# Altium PCB spider - Copy.PcbDoc
Units mm, origin at the board's own origin, x right, y up, seen from the top; angles counter-clockwise.
Board outline 30.2 x 24 mm, 4 copper layers (Top Layer, GND, 3V3, Bottom Layer), stack 0.603 mm thick; 52 components, 40 nets, 195 pads, 13 vias.
Unrouted connection lines stored in the file: 80.
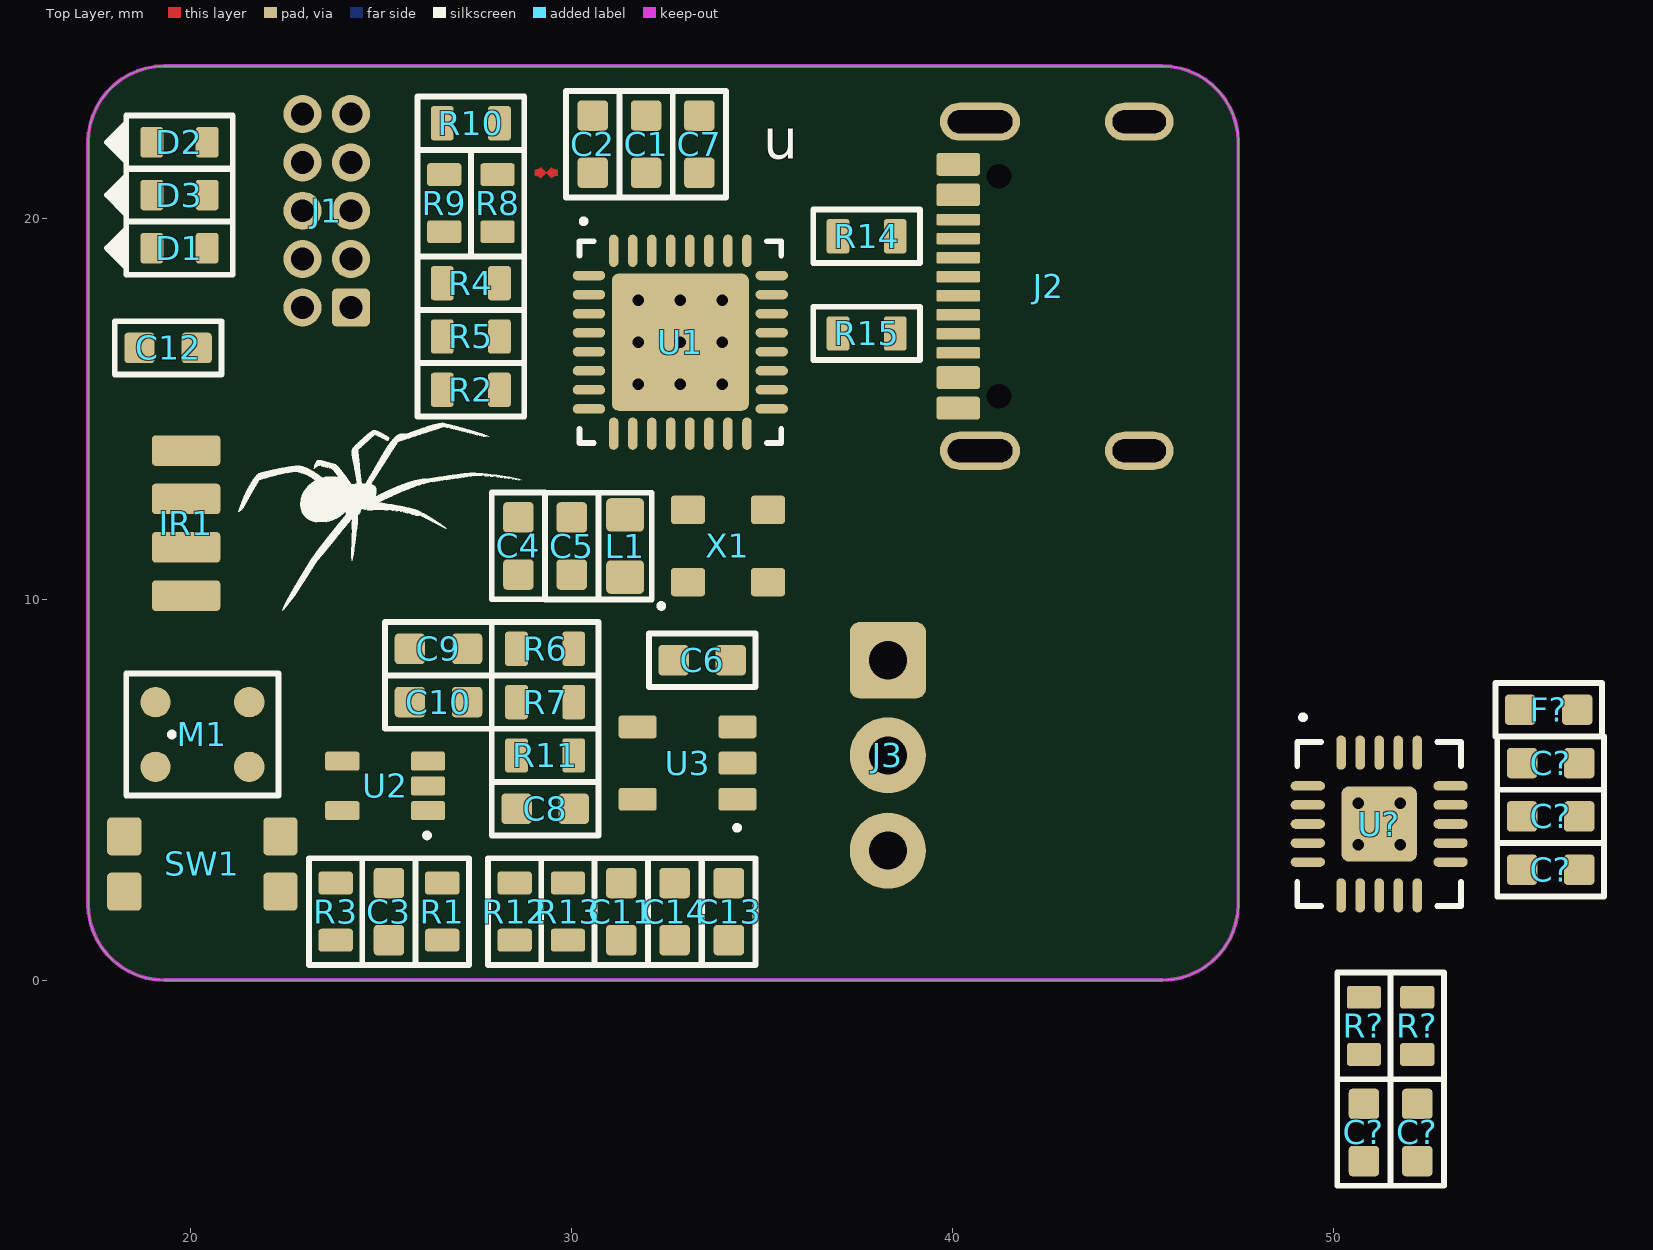
[diagram p0: Top Layer view]
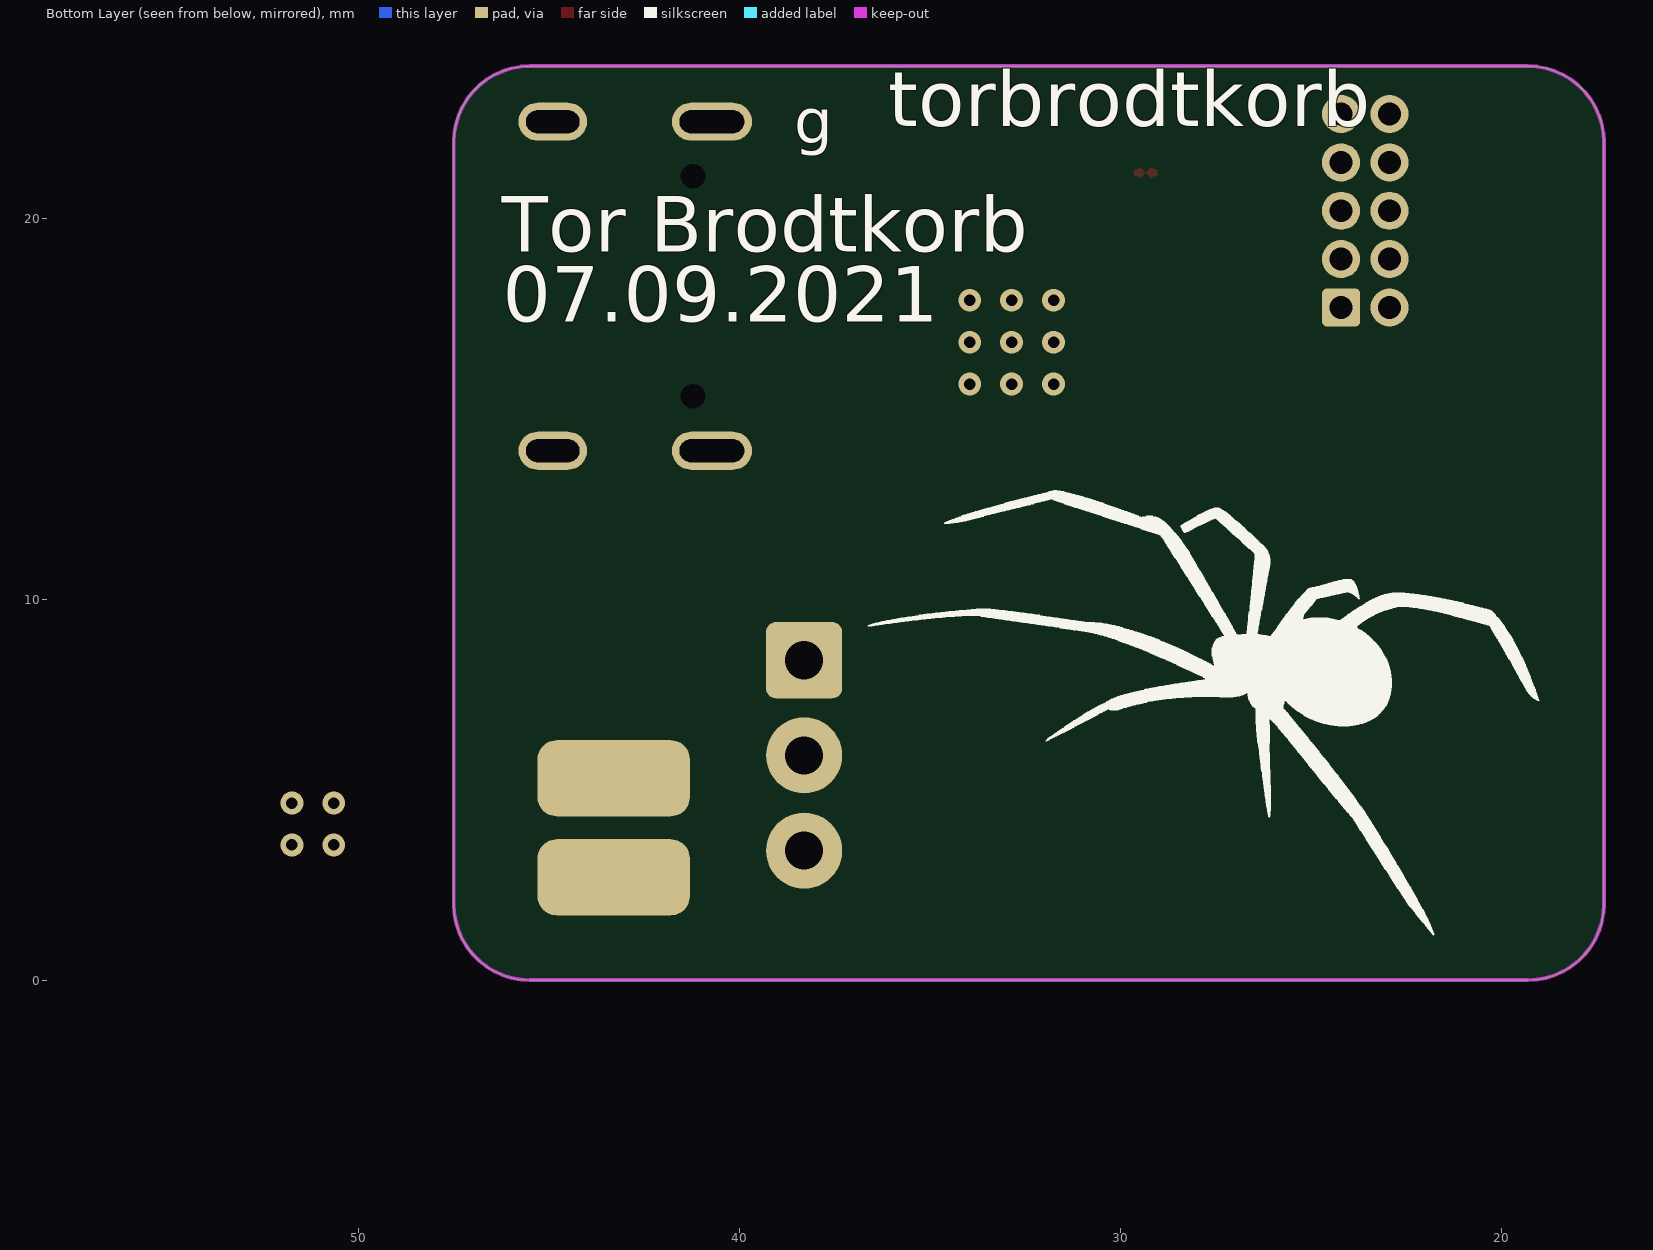
[diagram p1: Bottom Layer view, seen from below]
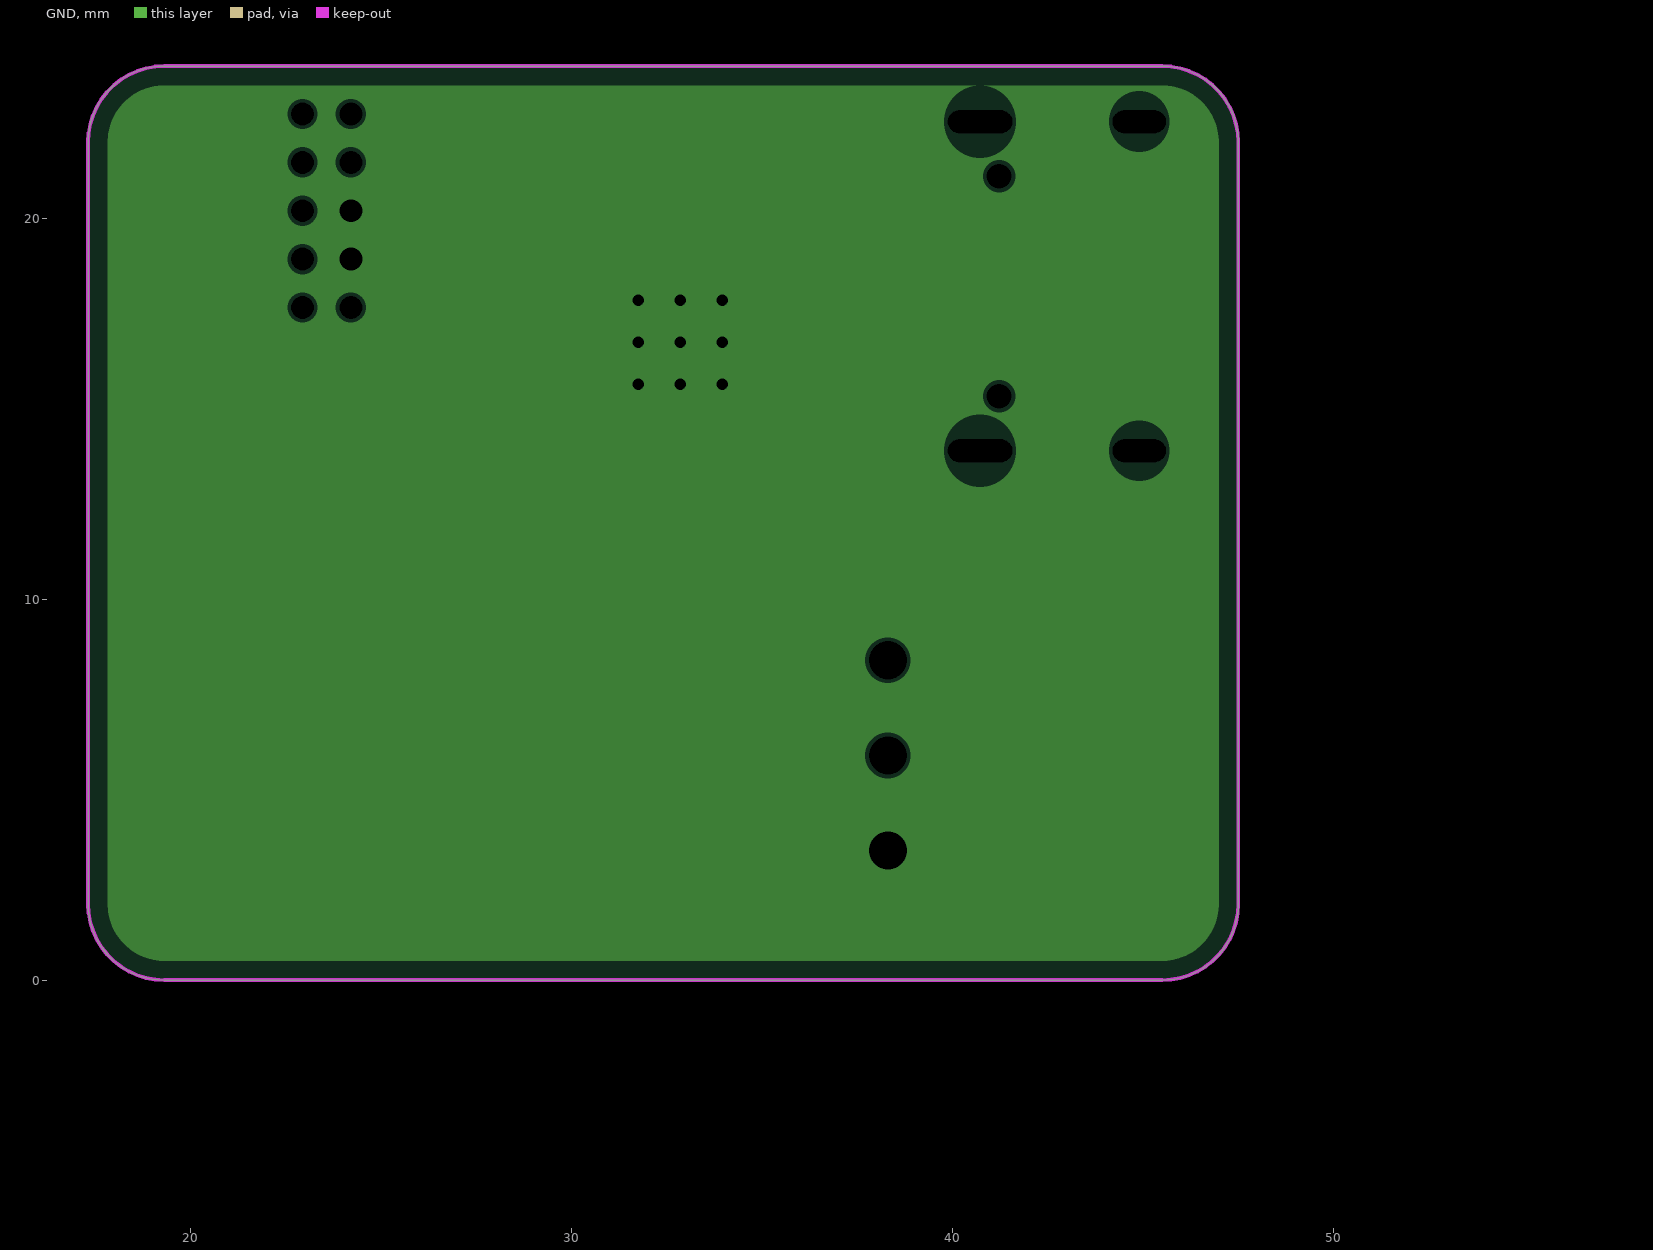
[diagram p2: GND, clearances drawn from the general rule]
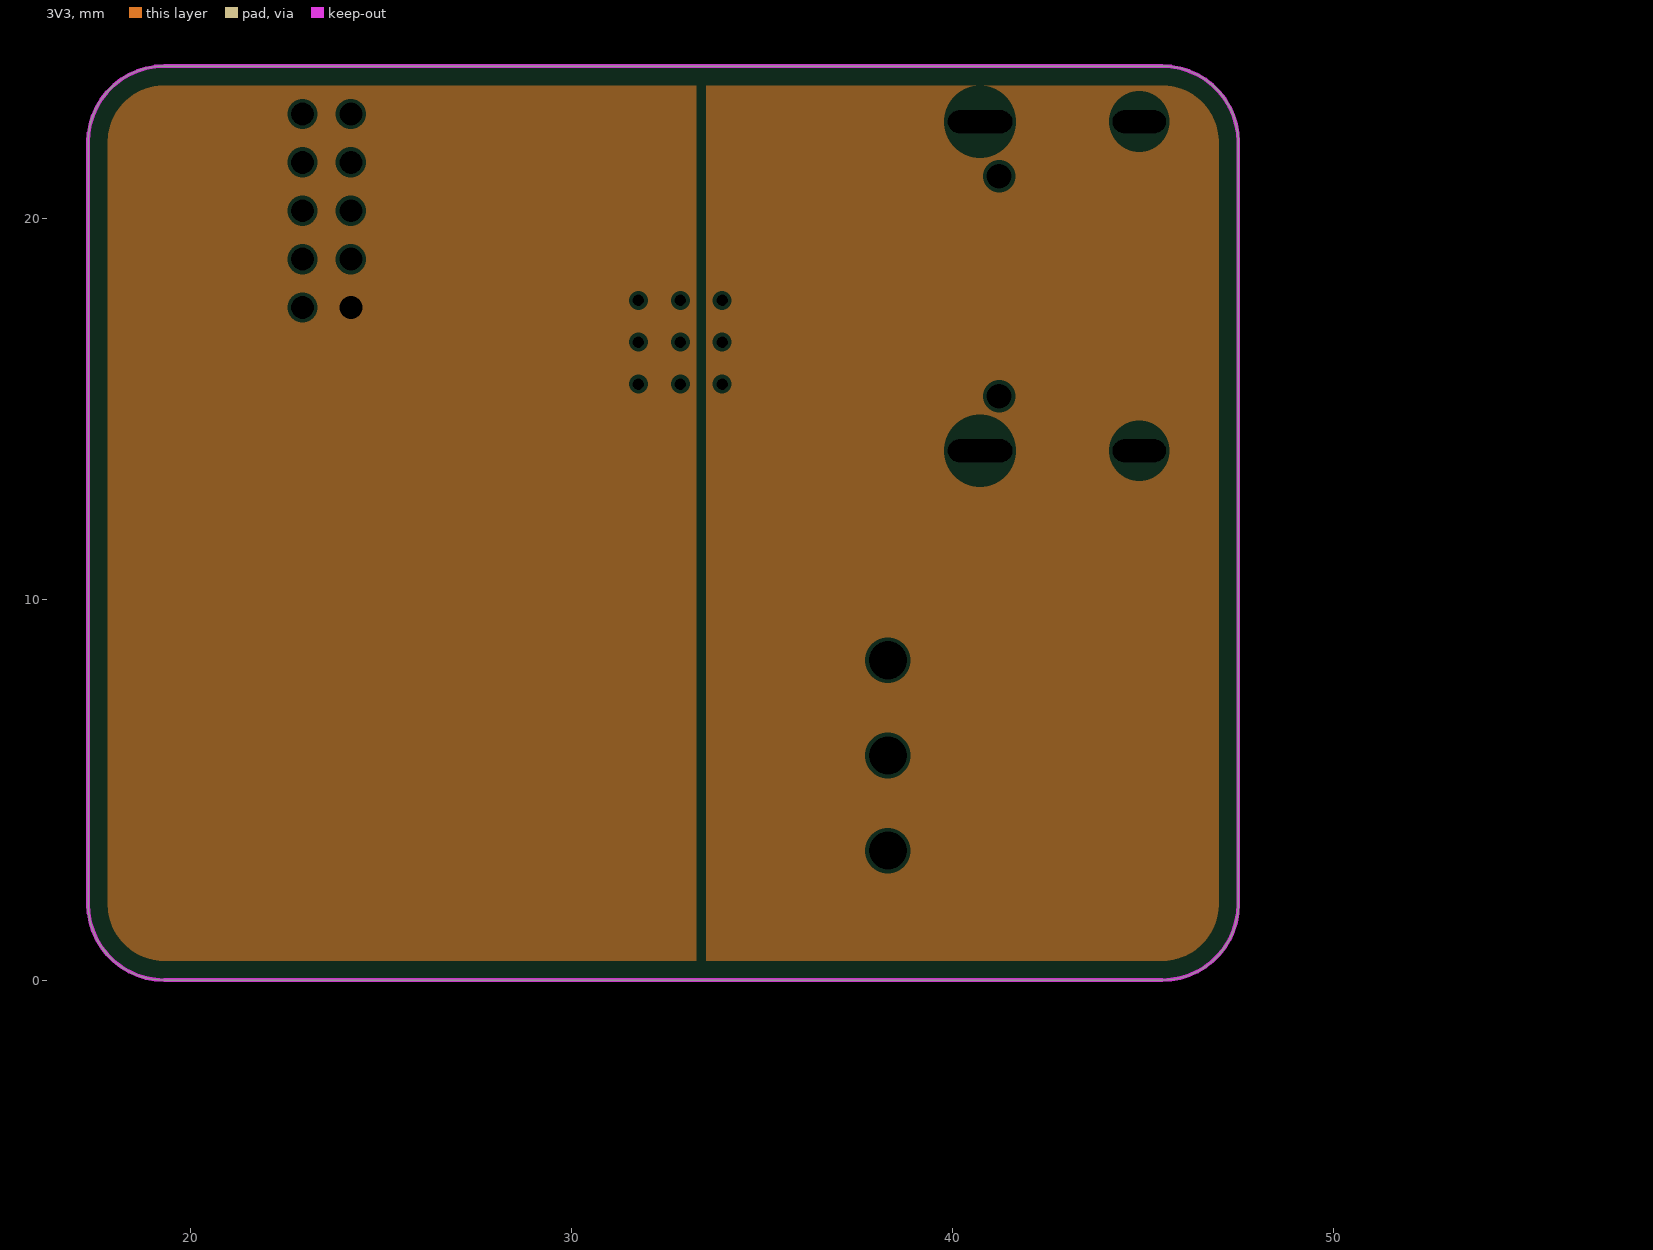
[diagram p3: 3V3, clearances drawn from the general rule]

## Layer stack, top to bottom
Top Solder: solder mask 0.0102, Solder Resist, Dk 3.5
Top Layer: signal copper 0.0356
Dielectric 2: prepreg 0.0711, PP-006, Dk 4.1
GND: plane copper 0.035, net GND
Dielectric 1: dielectric 0.32, FR-4, Dk 4.8
3V3: plane copper 0.035, net 3V3
Dielectric 3: prepreg 0.0711, PP-006, Dk 4.1
Bottom Layer: signal copper 0.0356
Bottom Solder: solder mask 0.0102, Solder Resist, Dk 3.5

## Board outline
17.3,2 ccw(c19.3,2) 19.3,0 45.5,0 ccw(c45.5,2) 47.5,2 47.5,22 ccw(c45.5,22) 45.5,24 19.3,24 ccw(c19.3,22) 17.3,22

## Design rules (kind name [scope] priority, off if disabled: settings)
BoardOutlineClearance [All] p1: gap=0.198 ignorepadtopadclearanceinfootprint=FALSE except(0: Arc-SplitContinuation Track-SplitContinuation SMDPad-SplitContinuation THPad-SplitContinuation Via-SplitContinuation Fill-SplitContinuation Poly-SplitContinuation Region-SplitContinuation Text-SplitContinuation)
Clearance [All] p1: gap=0.152 ignorepadtopadclearanceinfootprint=TRUE except(0.305: Arc-Hole Track-Hole SMDPad-Hole THPad-Hole Via-Hole Fill-Hole Poly-Hole Region-Hole Text-Hole)
ComponentClearance [All] p1: gap=0.1 collisioncheckmode=3 verticalgap=0.1 showdistances=FALSE
DiffPairsRouting DiffPairsRouting_USB [InDifferentialPair('USB')] p1: maxlimit=0.5 minlimit=0.16 mostfreqgap=0.2 toplayer_minwidth=0.16 toplayer_maxwidth=5 toplayer_prefwidth=0.265 bottomlayer_minwidth=0.16 bottomlayer_maxwidth=5 bottomlayer_prefwidth=0.265 maxuncoupledlength=12.7
DiffPairsRouting DiffPairsRouting_ETH [InDifferentialPair('ETH_RX') or InDifferentialPair('ETH_TX')] p2: maxlimit=0.5 minlimit=0.16 mostfreqgap=0.194 toplayer_minwidth=0.16 toplayer_maxwidth=5 toplayer_prefwidth=0.22 bottomlayer_minwidth=0.16 bottomlayer_maxwidth=5 bottomlayer_prefwidth=0.22 maxuncoupledlength=12.7
DiffPairsRouting [All] p3: maxlimit=0.5 minlimit=0.16 mostfreqgap=0.3 toplayer_minwidth=0.16 toplayer_maxwidth=5 toplayer_prefwidth=0.3 bottomlayer_minwidth=0.16 bottomlayer_maxwidth=5 bottomlayer_prefwidth=0.3 maxuncoupledlength=12.7
HoleSize [All] p1: absolutevalues=TRUE maxlimit=6.3 minlimit=0.025 maxpercent=80.000 minpercent=20.000
MatchedLengths MatchedLengths_1 [InNetClass('RX')] p1: tolerance=2 checknetsindiffpair=FALSE checkdiffpairvsdiffpair=TRUE checkxsignals=TRUE checkothers=TRUE
MatchedLengths [InNetClass('TX')] p2: tolerance=2 checknetsindiffpair=FALSE checkdiffpairvsdiffpair=TRUE checkxsignals=TRUE checkothers=TRUE
MinimumAnnularRing [All] p1: minimumring=0.102
MinimumSolderMaskSliver [All] p1: minsoldermaskwidth=0.1
PlaneClearance [All] p1: clearance=0.1
PlaneConnect [All] p1: planeconnectstyle=Relief reliefexpansion=0.15 reliefentries=4 reliefconductorwidth=0.152 reliefairgap=0.2
PolygonConnect [All] p1: connectstyle=Relief reliefconductorwidth=0.152 reliefentries=4 polygonreliefangle="90 Angle" airgapwidth=0.152
RoutingVias [All] p1: holewidth=0.3 width=0.6 viastyle="Through Hole" minholewidth=0.2 minwidth=0.45 maxholewidth=6.3 maxwidth=10
SilkToSilkClearance [All] p1: silktosilkclearance=0.152
SilkToSolderMaskClearance [IsPad] p1: minsilkscreentomaskgap=0.152 clearancetoexposedcopper=TRUE
SolderMaskExpansion [All] p1: expansion=0.076 istentingtop=FALSE
Width [All] p1: maxlimit=10 minlimit=0.152 preferedwidth=0.152 minimp=50.000000 maximp=50.000000 favimp=50.000000
22 further rules are at their usual default settings.

## Classes and differential pairs
component class spider: C1 C2 C3 C4 C5 C6 C7 C8 C9 C10 C11 C12 C13 C14 C? D1 D2 D3 F? IR1 J1 J2 J3 L1 M1 R1 R2 R3 R4 R5 R6 R7 R8 R9 R10 R11 R12 R13 R14 R15 R? SW1 U1 U2 U3 U? X1
differential pair USB: +USB_P -USB_N

## Components (designator, comment, footprint, x,y, rotation, side; value= is the part's Value field where it differs from the comment)
C1 "passive_5" "capacitor 0603" 31.95,21.95 r270 top value=10uF
C2 "passive_5" "capacitor 0603" 30.55,21.95 r270 top value=100nF
C3 "passive_5" "capacitor 0603" 25.2,1.8 r90 top value=1uF
C4 "passive_5" "capacitor 0603" 28.6,11.4 r90 top value=10uF
C5 "passive_5" "capacitor 0603" 30,11.399 r90 top value=100nF
C6 "passive_5" "capacitor 0603" 33.423,8.4 r180 top value=100nF
C7 "passive_5" "capacitor 0603" 33.35,21.95 r270 top value=1uF
C8 "passive_5" "capacitor 0603" 29.3,4.5 r0 top value=1uF
C9 "passive_5" "capacitor 0603" 26.5,8.7 r0 top value=1uF
C10 "passive_5" "capacitor 0603" 26.5,7.3 r180 top value=10uF
C11 "passive_5" "capacitor 0603" 31.3,1.8 r90 top value=1uF
C12 "passive_5" "capacitor 0603" 19.4,16.6 r180 top value=1uF
C13 "passive_5" "capacitor 0603" 34.123,1.8 r90 top value=100nF
C14 "passive_5" "capacitor 0603" 32.7,1.8 r90 top value=1uF
C? "passive_5" "capacitor 0603" 50.8,-4 r90 top value=47pF
C? "passive_5" "capacitor 0603" 52.2,-4 r90 top value=47pF
C? "passive_5" "capacitor 0603" 55.7,2.9 r180 top value=100nF
C? "passive_5" "capacitor 0603" 55.7,5.7 r180 top value=100nF
C? "passive_5" "capacitor 0603" 55.7,4.3 r180 top value=4.7uF
D1 "LED White" "LED 0603 white" 19.7,19.219 r180 top
D2 "LED White" "LED 0603 white" 19.7,22 r180 top
D3 "LED White" "LED 0603 white" 19.7,20.613 r180 top
F? "passive_8" "ferrit bead 0603" 55.65,7.1 r180 top value="480Ω @ 100MHz"
IR1 "sensor_1" TSSP77038TR 19.873,12 r90 top
J1 "Header 1.27mm" "header male 2x5, pitch 1.27mm" 23.565,20.202 r180 top
J2 "USB 2.0" USB4105-GF-A 42.523,18.22 r90 top locked
J3 "connector_41" "S3B-XH-A (LF)(SN)" 38.3,5.9 r270 top
L1 "passive_9" "inductor 0603" 31.4,11.399 r90 top value=10uH
M1 "MEMS Microphone" SPU0410HR5H-PB 20.3,6.45 r90 top
R1 "passive_2" "resistor 0603" 26.6,1.8 r90 top value=10kΩ
R2 "passive_2" "resistor 0603" 27.35,15.5 r0 top value=10kΩ
R3 "passive_2" "resistor 0603" 23.8,1.8 r90 top value=10kΩ
R4 "passive_2" "resistor 0603" 27.35,18.3 r0 top value=10kΩ
R5 "passive_2" "resistor 0603" 27.35,16.9 r0 top value=10kΩ
R6 "passive_2" "resistor 0603" 29.3,8.7 r180 top value=10kΩ
R7 "passive_2" "resistor 0603" 29.3,7.3 r0 top value=10kΩ
R8 "passive_2" "resistor 0603" 28.05,20.4 r90 top value=10kΩ
R9 "passive_2" "resistor 0603" 26.65,20.4 r90 top value=10kΩ
R10 "passive_2" "resistor 0603" 27.35,22.5 r0 top value=39Ω
R11 "passive_2" "resistor 0603" 29.3,5.9 r180 top value=10kΩ
R12 "passive_2" "resistor 0603" 28.5,1.8 r90 top value=39Ω
R13 "passive_2" "resistor 0603" 29.9,1.8 r270 top value=10kΩ
R14 "passive_2" "resistor 0603" 37.742,19.532 r0 top value=5.1kΩ
R15 "passive_2" "resistor 0603" 37.742,16.979 r0 top value=5.1kΩ
R? "passive_2" "resistor 0603" 52.2,-1.2 r270 top value=27Ω
R? "passive_2" "resistor 0603" 50.8,-1.2 r270 top value=27Ω
SW1 "connector_35" "KMR621NG LFS" 20.3,3.05 r0 top
U1 "SAMD21" ATSAMD21E17D-MUT 32.85,16.75 r0 top
U2 "ic_6" MCP6241T-E/OT 25.1,5.1 r180 top
U3 "regulator_1" TCR2EF33,LM(CT 33.04,5.7 r180 top
U? "FTDI" FT231XQ-R 51.2,4.1 r0 top
X1 "8 MHz" DSC6001CE2A-008.0000 34.1,11.4 r90 top

## Footprints (in the part's own frame and the unit in brackets; to place one, negate y for a bottom-side part, rotate by r counter-clockwise, add the part's x,y. Pads: shape width x height; smd on the part's side, far side on the other; paste and mask are expansions set on the pad)
ATSAMD21E17D-MUT [mm] "QFN, 32-Leads, Body 5.00x5.00mm, Pitch 0.50mm, Thermal Pad 3.60x3.60mm, IPC Medium Density"
  oval 0.85x0.25 smd: 1(-2.4,1.75) 2(-2.4,1.25) 3(-2.4,0.75) 4(-2.4,0.25) 5(-2.4,-0.25) 6(-2.4,-0.75) 7(-2.4,-1.25) 8(-2.4,-1.75) 17(2.4,-1.75) 18(2.4,-1.25) 19(2.4,-0.75) 20(2.4,-0.25) 21(2.4,0.25) 22(2.4,0.75) 23(2.4,1.25) 24(2.4,1.75)
  oval 0.25x0.85 smd: 9(-1.75,-2.4) 10(-1.25,-2.4) 11(-0.75,-2.4) 12(-0.25,-2.4) 13(0.25,-2.4) 14(0.75,-2.4) 15(1.25,-2.4) 16(1.75,-2.4) 25(1.75,2.4) 26(1.25,2.4) 27(0.75,2.4) 28(0.25,2.4) 29(-0.25,2.4) 30(-0.75,2.4) 31(-1.25,2.4) 32(-1.75,2.4)
  rrect10% 3.6x3.6 smd: 33(0,0)
  silkscreen extent -2.65,-2.65 2.65,3.22, body extent -2.5,-2.5 2.5,2.5, height 1
"capacitor 0603" [mm]
  rrect25% 0.8x0.8 smd: 1(-0.75,0) 2(0.75,0)
  silkscreen extent -1.4,-0.7 1.4,0.7, body extent -0.8,-0.4 0.8,0.4, height 0.8
DSC6001CE2A-008.0000 [mm]
  rrect25% 0.75x0.9 smd: 1(-0.95,1.05) 2(-0.95,-1.05) 3(0.95,-1.05) 4(0.95,1.05)
  silkscreen extent -1.62,1.7 -1.53,1.8, body extent -1.25,-1.6 1.25,1.6, height 0.85
"ferrit bead 0603" [mm]
  rrect25% 0.8x0.8 smd: 1(-0.75,0) 2(0.75,0)
  silkscreen extent -1.4,-0.7 1.4,0.7, body extent -0.79,-0.4 0.81,0.4, height 0.8
FT231XQ-R [mm] "QFN, 20-Leads, Body 4.00x4.00mm, Pitch 0.50mm, Thermal Pad 1.98x1.98mm, IPC Medium Density"
  oval 0.9x0.25 smd: 1(-1.875,1) 2(-1.875,0.5) 3(-1.875,0) 4(-1.875,-0.5) 5(-1.875,-1) 11(1.875,-1) 12(1.875,-0.5) 13(1.875,0) 14(1.875,0.5) 15(1.875,1)
  oval 0.25x0.9 smd: 6(-1,-1.875) 7(-0.5,-1.875) 8(0,-1.875) 9(0.5,-1.875) 10(1,-1.875) 16(1,1.875) 17(0.5,1.875) 18(0,1.875) 19(-0.5,1.875) 20(-1,1.875)
  rrect20% 1.98x1.98 smd: 21(0,0)
  silkscreen extent -2.15,-2.15 2.15,2.85, body extent -2,-2 2,2, height 0.8
"header male 2x5, pitch 1.27mm" [mm]
  rrect25% 1x1 hole 0.6: 1(-0.635,2.54)
  round 1 hole 0.6: 2(0.635,2.54) 3(-0.635,1.27) 4(0.635,1.27) 5(-0.635,0) 6(0.635,0) 7(-0.635,-1.27) 8(0.635,-1.27) 9(-0.635,-2.54) 10(0.635,-2.54)
  body extent -1.7,-3.17 1.7,3.17, height 5.35
"inductor 0603" [mm]
  rrect25% 0.88x0.99 smd: 1(-0.815,0) 2(0.815,0)
  silkscreen extent -1.4,-0.7 1.4,0.7, body extent -0.87,-0.48 0.87,0.48, height 0.91
"KMR621NG LFS" [mm]
  rrect25% 0.9x1 smd: 1(-2.05,0.725) 1(2.05,0.725) 2(-2.05,-0.725) 2(2.05,-0.725)
  body extent -2.3,-1.4 2.3,1.4, height 1.9
"LED 0603 white" [mm]
  rrect25% 0.6x0.8 smd: 1(-0.725,0) 2(0.725,0)
  silkscreen extent -1.4,-0.7 1.9,0.7, body extent -0.8,-0.4 0.8,0.4, height 0.6
MCP6241T-E/OT [mm] "SOT23, 5-Leads, Body 2.03x2.10mm, Pitch 0.65mm, IPC Medium Density"
  rrect25% 0.9x0.5 smd: 1(-1.125,0.65) 2(-1.125,0) 3(-1.125,-0.65) 4(1.125,-0.65) 5(1.125,0.65)
  silkscreen extent -1.15,1.25 -1.05,1.35, body extent -1.3,-1.12 1.3,1.12, height 1.1
"resistor 0603" [mm]
  rrect25% 0.6x0.9 smd: 1(-0.75,0) 2(0.75,0)
  silkscreen extent -1.4,-0.7 1.4,0.7, body extent -0.8,-0.45 0.8,0.45, height 0.5
"S3B-XH-A (LF)(SN)" [mm]
  rrect25% 2x2 hole 1: 1(-2.5,0)
  round 2 hole 1: 2(0,0) 3(2.5,0)
  body extent -4.95,-2.3 4.95,9.2, height 6.1
SPU0410HR5H-PB [mm]
  round 0.8 smd: 1(0.85,1.23) 2(0.85,-1.23) 3(-0.85,-1.23) 4(-0.85,1.23)
  silkscreen extent -1.6,-2 1.6,2, body extent -1.47,-1.88 1.48,1.88, height 1.1
TCR2EF33,LM(CT [mm] "SOT23, 5-Leads, Body 2.90x2.80mm, Pitch 0.95mm, IPC Medium Density"
  rrect25% 1x0.6 smd: 1(-1.31,0.95) 2(-1.31,0) 3(-1.31,-0.95) 4(1.31,-0.95) 5(1.31,0.95)
  silkscreen extent -1.35,1.65 -1.25,1.75, body extent -1.41,-1.46 1.41,1.46, height 1.12
TSSP77038TR [mm]
  rrect25% 0.8x1.8 smd: 1(-1.905,0) 2(-0.635,0) 3(0.635,0) 4(1.905,0)
  body extent -3.46,-0.65 3.44,2.45, height 3.21
USB4105-GF-A [mm]
  rrect25% 0.6x1.15 smd: A1_B12(-3.2,2.378) A4_B9(-2.4,2.378) B1_A12(3.2,2.378) B4_A9(2.4,2.378)
  rrect25% 0.3x1.15 smd: A5(-1.25,2.378) A6(-0.25,2.378) A7(0.25,2.378) A8(1.25,2.378) B5(1.75,2.378) B6(0.75,2.378) B7(-0.75,2.378) B8(-1.75,2.378)
  oval 1x1.8 hole 0.6 slot 1.4 at 90 deg: SHELL(-4.32,-2.377) SHELL(4.32,-2.377)
  oval 1x2.1 hole 0.6 slot 1.7 at 90 deg: SHELL(-4.32,1.803) SHELL(4.32,1.803)
  round 0 hole 0.65: ""(-2.89,1.303) ""(2.89,1.303)
  body extent -4.79,-4.98 4.79,2.73, height 3.31

## Part data
C1 C2 C3 C4 C5 C6 C7 C8 C9 C10 C11 C12 C13 C14 C? C? C? C? C?: "Capacitor 0603"
D1 D2 D3: library part diode_6, "LED 0603 white"
F?: "Ferrite bead 0603"
IR1: "IR receiver, 38 kHz, 40m, SMD", Manufacturer 1="Vishay Semiconductor Opto Division", Manufacturer Part Number 1=TSSP77038TR, Supplier Part Number 1=TSSP77038TRCT-ND, Supplier 1=Digi-Key
J1: library part connector_17, "Header male 2x5, pitch 1.27mm"
J2: library part connector_35, "USB-C (2.0)", Manufacturer 1=GCT, Manufacturer Part Number 1=USB4105-GF-A, Supplier Part Number 1=2073-USB4105-GF-ACT-ND, Link=https://www.digikey.no/product-detail/no/gct/USB4105-GF-A/2073-USB4105-GF-ACT-ND/11198510, Supplier 1=Digi-Key
J3: "JST connector 1x3, pitch 2.5mm, right angle, TH", Manufacturer 1="JST (JAPAN SOLDERLESS TERMINALS)", Manufacturer Part Number 1="S3B-XH-A (LF)(SN)", Supplier Part Number 1=1516290, Link=https://no.farnell.com/jst-japan-solderless-terminals/s3b-xh-a-lf-sn/header-right-angle-3way/dp/1516290?st=jst, Supplier 1=Farnell
L1: "Inductor 0603"
M1: library part sensor_2, "Microphone, MEMS, 100 Hz - 10 kHz, 3.3V,  SMD", Manufacturer 1=Knowles, Manufacturer Part Number 1=SPU0410HR5H-PB, Supplier Part Number 1=423-1138-1-ND, Supplier 1=Digi-Key
R1 R2 R3 R4 R5 R6 R7 R8 R9 R10 R11 R12 R13 R14 R15 R? R?: "Resistor 0603"
SW1: "Tactile switch SMD, tiny", Manufacturer 1=C&K, Manufacturer Part Number 1="KMR621NG LFS", Supplier Part Number 1=CKN10684CT-ND, Link=https://www.digikey.no/product-detail/en/c-k/KMR621NG-LFS/CKN10684CT-ND/6035356, Supplier 1=Digi-Key
U1: library part cpu_0, "SAMD21, 48 MHz, 128KB flash, 16KB RAM, 32 pins, USB device, QFN", Manufacturer 1="Microchip Technology", Manufacturer Part Number 1=ATSAMD21E17D-MUT, Supplier Part Number 1=ATSAMD21E17D-MUTTR-ND, Link=https://www.digikey.no/products/no?keywords=ATSAMD21E17D-MUTTR-ND, Supplier 1=Digi-Key
U2: "OpAmp, 1 circuit, rail-to-rail, single supply, 1.8V to 5V, SOT23-5", Manufacturer 1="Microchip Technology", Manufacturer Part Number 1=MCP6241T-E/OT, Supplier Part Number 1=MCP6241T-E/OTCT-ND, Supplier 1=Digi-Key
U3: "LDO fixed, 3.3V output, 0.2V dropout, 200mA", Current=200mA, Manufacturer 1="Toshiba Semiconductor and Storage", Manufacturer Part Number 1=TCR2EF33,LM(CT, Output voltage=3.3V, Supplier Part Number 1=TCR2EF33LM(CTCT-ND, Dropout=0.2V, Link=https://www.digikey.no/product-detail/en/toshiba-semiconductor-and-storage/TCR2EF33-LM-CT/TCR2EF33LM-CTCT-ND/4503328, Supplier 1=Digi-Key
U?: library part ic_1, "USB to UART converter, FTDI, single, 20 pins, QFN", Manufacturer 1="FTDI, Future Technology Devices International Ltd", Manufacturer Part Number 1=FT231XQ-R, Supplier Part Number 1=768-1128-1-ND, Supplier 1=Digi-Key
X1: library part oscillator_2, "Oscillator, 8MHz, 3.3V, 3.2mm x 2.5mm", Manufacturer 1="Microchip Technology", Manufacturer Part Number 1=DSC6001CE2A-008.0000, Supplier Part Number 1=DSC6001CE2A-008.0000-ND, Link=https://www.digikey.com/en/products/detail/microchip-technology/DSC6001CE2A-008-0000/7732669, Supplier 1=Digi-Key

## Free pads (board coordinates)
  rrect50% 4x2 smd far side: 21(43.3,2.7) 21(43.3,5.3)

## Via types
v1: diameter 0.6, hole 0.3, Top Layer to Bottom Layer, tented bottom, 9 vias
v2: diameter 0.6, hole 0.3, Top Layer to Bottom Layer, 4 vias

## Nets (pads, with @x,y where several pads share a name; then routed paths per layer and width w, separated by ;. In a path a pad name is that pad's centre, name@x,y a point inside that pad or via, vN(x,y) a via of type N, cw(c..) or ccw(c..) an arc to the next point about the centre after c; other vN are vias at no path point)
3V3: C1.2 C2.2 C6.2 C9.2 C12.2 C14.2 IR1.2 J1.1 L1.1 M1.1 R1.1 R6.2 R8.2 R9.2 U1.30 U2.5 U3.5 X1.1 X1.4
5V: C13.2 F?.1 J2.A4_B9 J2.B4_A9 J3.1 U3.1 U3.3
BUTTON: C3.2 R1.2 SW1.1 U1.7
GND: C1.1 C2.1 C3.1 C4.1 C5.1 C6.1 C7.1 C8.1 C9.1 C11.1 C12.1 C13.1 C14.1 C?.1 D1.2 D2.2 D3.2 IR1.1 IR1.4 J1.3 J1.5 J2.A1_B12 J2.B1_A12 J3.3 M1.2 M1.3 R3.2 R11.1 R14.1 R15.1 U1.10 U1.28 U1.33 U2.2 U3.2 U?.3 U?.13 U?.21 X1.2
  other v1: 31.75,15.65 32.85,15.65 33.95,15.65 31.75,16.75 32.85,16.75 33.95,16.75 31.75,17.85 32.85,17.85 33.95,17.85
  other v2: 50.65,3.55 51.75,3.55 50.65,4.65 51.75,4.65
IR: IR1.3 U1.6
LED1: R2.2 U1.5
LED2: R4.2 U1.3
LED3: R5.2 U1.4
Ledstrip: J3.2 U1.16
NetC4_2: C4.2 C5.2 L1.2 U1.9
NetC8_2: C8.2 R6.1 R7.2
NetC10_1: C10.1 R7.1 R11.2 U2.3
NetC10_2: C10.2 M1.4
NetC11_2: C11.2 R13.1
NetC?_2: C?.2@54.95,2.9 U?.10 U?.11 U?.20
NetC?_2: C?.2@54.95,4.3 C?.2@54.95,5.7 F?.2 U?.12
NetD1_1: D1.1 R2.1
NetD2_1: D2.1 R4.1
NetD3_1: D3.1 R5.1
NetJ1_2: J1.2 R8.1 U1.32
NetJ1_4: J1.4 R9.1 U1.31
NetJ1_10: J1.10 R10.1
NetJ2_A5: J2.A5 R15.2
NetJ2_B5: J2.B5 R14.2
NetR3_1: R3.1 SW1.2
NetR10_2: R10.2 U1.26
NetR12_1: R12.1 R13.2 U2.4
NetR?_1: R?.1@52.2,-0.45 U?.9
NetR?_1: R?.1@50.8,-0.45 U?.8
NetU1_15: U1.15 X1.3
PA10: U1.13
PA11: U1.14
PA16: U1.17
PA17: U1.18
SOUND: R12.2 U1.8 U2.1
UART_RX: U1.1 U?.17
UART_TX: U1.2 U?.1
USB_N: C?.2@52.2,-3.25 J2.A7 J2.B7 R?.2@52.2,-1.95 U1.23
USB_P: C?.2@50.8,-3.25 J2.A6 J2.B6 R?.2@50.8,-1.95 U1.24
VDDCORE: C7.2 U1.29
pads on no net: J1.6 J1.7 J1.8 J1.9 J2. J2.A8 J2.B8 J2.SHELL U1.11 U1.12 U1.19 U1.20 U1.21 U1.22 U1.25 U1.27 U3.4 U?.2 U?.4 U?.5 U?.6 U?.7 U?.14 U?.15 U?.16 U?.18 U?.19

## Polygon pours and split planes (outlines as drawn)
GND on Bottom Layer "BOTTOM GND" (solid, remove dead copper, shelved, pour order 1): 17.3,2 ccw(c19.3,2) 19.3,0 45.5,0 ccw(c45.5,2) 47.5,2 47.5,22 ccw(c45.5,22) 45.5,24 19.3,24 ccw(c19.3,22) 17.3,22
GND on Top Layer "NONET_L01_P000" (solid, remove dead copper, shelved, pour order 0): 17.3,2 ccw(c19.3,2) 19.3,0 45.5,0 ccw(c45.5,2) 47.5,2 47.5,22 ccw(c45.5,22) 45.5,24 19.3,24 ccw(c19.3,22) 17.3,22
3V3 on 3V3 (split plane): 45.667,23.482 45.832,23.454 45.993,23.408 46.147,23.344 46.294,23.263 46.43,23.166 46.555,23.055 46.666,22.93 46.763,22.794 46.844,22.647 46.908,22.493 46.954,22.332 46.982,22.167 46.991,22.015 46.99,22 46.99,2 46.991,1.985 46.982,1.833 46.954,1.668 46.908,1.507 46.844,1.353 46.763,1.206 46.666,1.07 46.555,0.945 46.43,0.834 46.294,0.737 46.147,0.656 45.993,0.592 45.832,0.546 45.667,0.518 45.515,0.509 45.5,0.51 33.529,0.51 33.529,7.4 33.529,23.49 45.5,23.49 45.515,23.491
3V3 on 3V3 (split plane): 19.3,23.49 33.271,23.49 33.271,7.4 33.271,0.51 19.3,0.51 19.285,0.509 19.133,0.518 18.968,0.546 18.807,0.592 18.653,0.656 18.506,0.737 18.37,0.834 18.245,0.945 18.134,1.07 18.037,1.206 17.956,1.353 17.892,1.507 17.846,1.668 17.818,1.833 17.809,1.985 17.81,2 17.81,22 17.809,22.015 17.818,22.167 17.846,22.332 17.892,22.493 17.956,22.647 18.037,22.794 18.134,22.93 18.245,23.055 18.37,23.166 18.506,23.263 18.653,23.344 18.807,23.408 18.968,23.454 19.133,23.482 19.285,23.491
GND on GND (split plane): 19.3,23.49 45.5,23.49 45.515,23.491 45.667,23.482 45.832,23.454 45.993,23.408 46.147,23.344 46.294,23.263 46.43,23.166 46.555,23.055 46.666,22.93 46.763,22.794 46.844,22.647 46.908,22.493 46.954,22.332 46.982,22.167 46.991,22.015 46.99,22 46.99,2 46.991,1.985 46.982,1.833 46.954,1.668 46.908,1.507 46.844,1.353 46.763,1.206 46.666,1.07 46.555,0.945 46.43,0.834 46.294,0.737 46.147,0.656 45.993,0.592 45.832,0.546 45.667,0.518 45.515,0.509 45.5,0.51 19.3,0.51 19.285,0.509 19.133,0.518 18.968,0.546 18.807,0.592 18.653,0.656 18.506,0.737 18.37,0.834 18.245,0.945 18.134,1.07 18.037,1.206 17.956,1.353 17.892,1.507 17.846,1.668 17.818,1.833 17.809,1.985 17.81,2 17.81,22 17.809,22.015 17.818,22.167 17.846,22.332 17.892,22.493 17.956,22.647 18.037,22.794 18.134,22.93 18.245,23.055 18.37,23.166 18.506,23.263 18.653,23.344 18.807,23.408 18.968,23.454 19.133,23.482 19.285,23.491

## Keep-outs
Keep-Out Layer:
  the board outline again, w0.1

## Other copper
3V3 (plane layer: these items are gaps in the copper):
  lines w0.254: 33.4,0 33.4,7.4 33.4,24 37.7,24

## Silkscreen, mask and mechanical layers (free items; w line width, h text height)
Top Overlay:
  region: 5254 vertices and 0 holes, not listed, extent 21.242,9.704 28.679,14.631
  text "u" at 35.029,21.211 h1.8
Bottom Overlay:
  region: 5254 vertices and 0 holes, not listed, extent 18.999,1.175 36.633,12.858
  text "torbrodtkorb" at 36.095,21.939 h2.5
  text "g" at 38.565,21.597 h2
  text "Tor Brodtkorb" at 46.239,18.643 h2.5
  text "07.09.2021" at 46.209,16.803 h2.5